# Altium PCB Simon PCB.PcbDoc
Units mil, origin at the board's own origin, x right, y up, seen from the top; angles counter-clockwise.
Board outline 6740 x 4045 mil, 2 copper layers (Top Layer, Bottom Layer); 33 components, 33 nets, 142 pads, 15 vias.
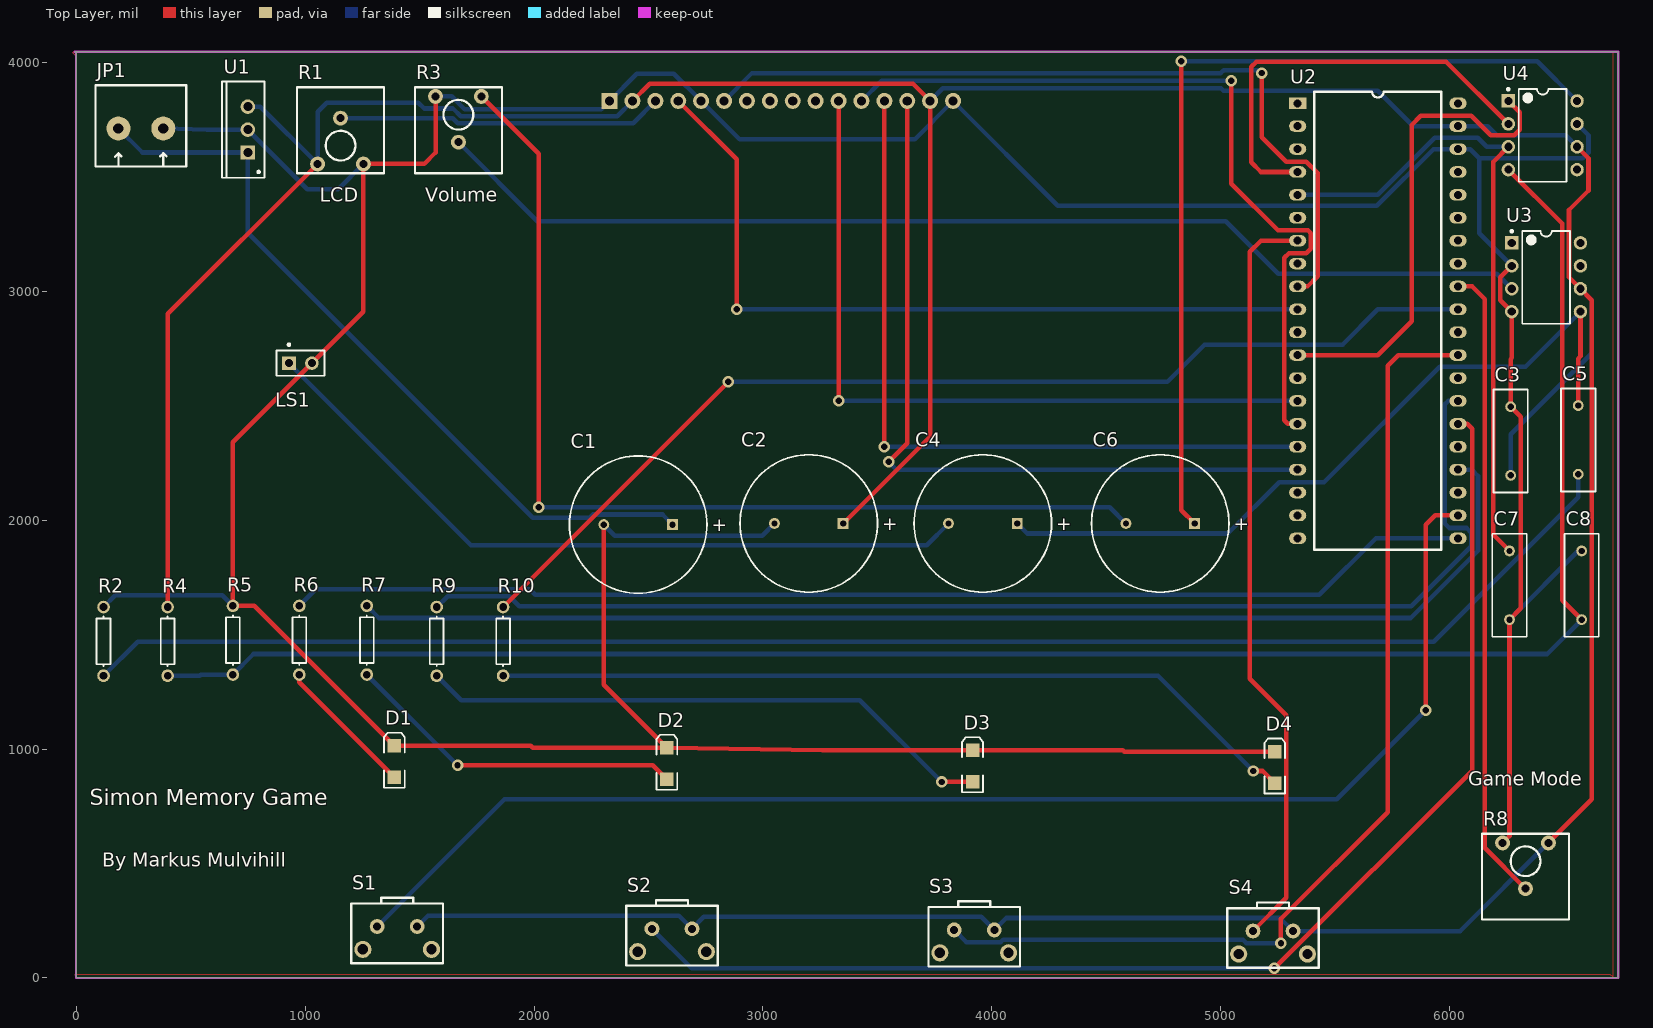
[diagram p0: Top Layer view]
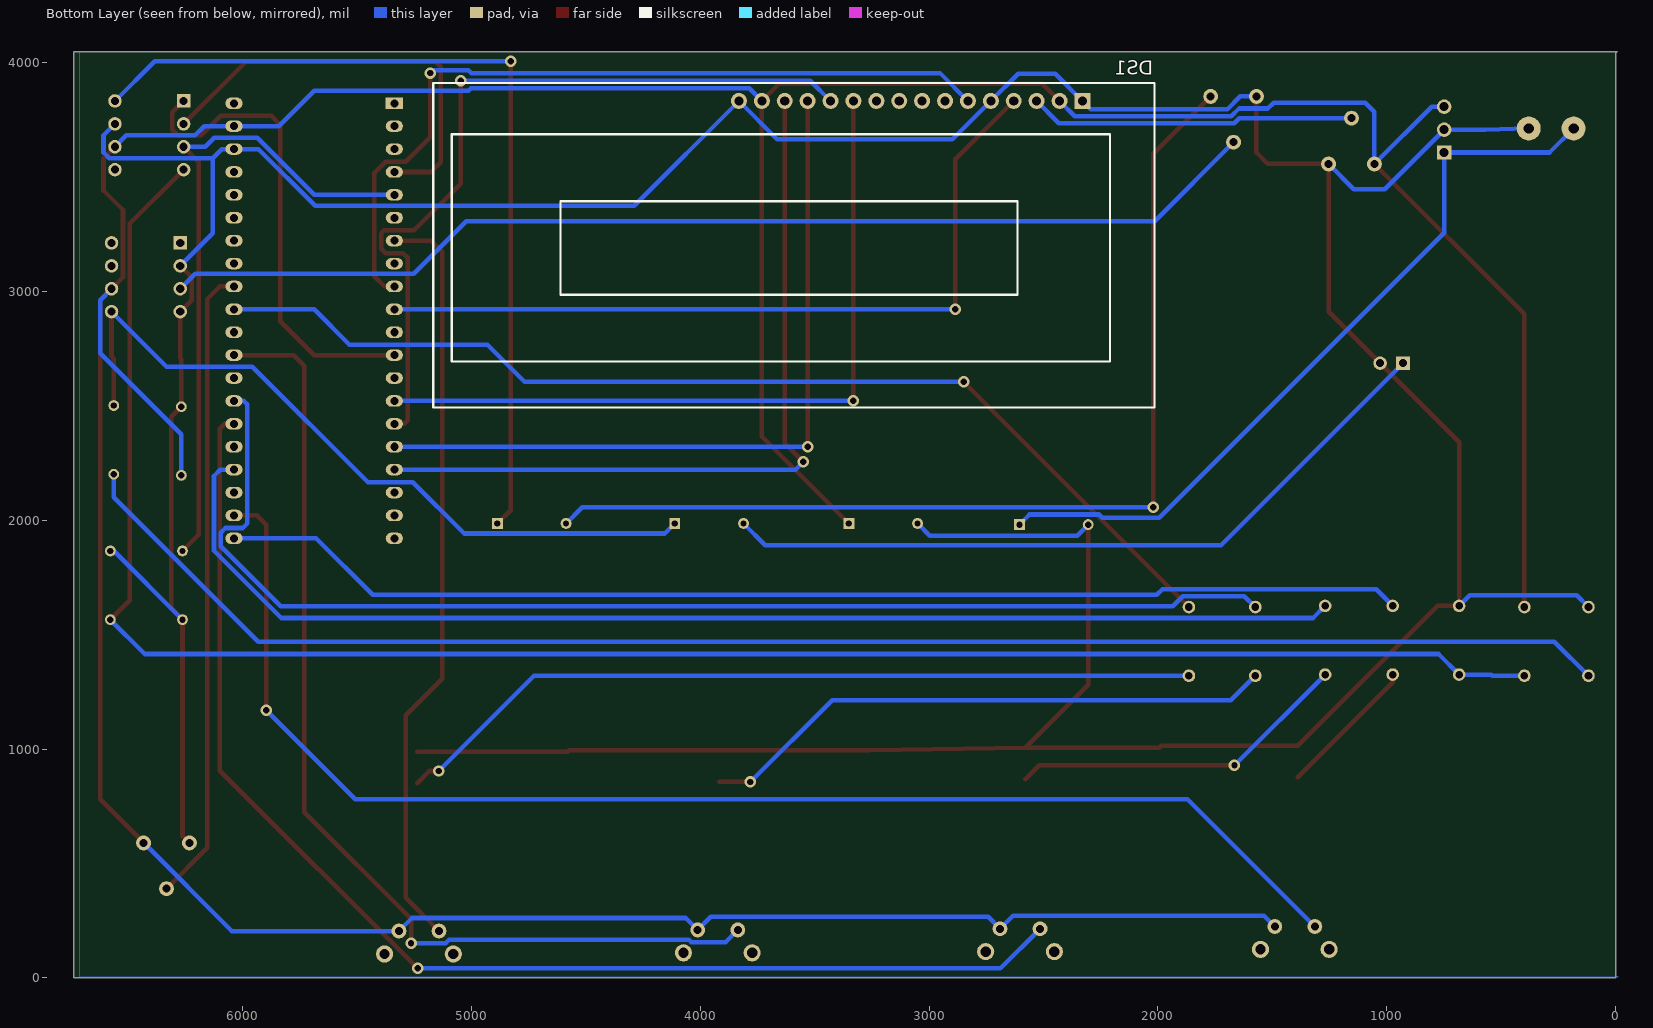
[diagram p1: Bottom Layer view, seen from below]

## Layer stack, top to bottom
Top Solder: solder mask 0.4, Solder Resist, Dk 3.5
Top Layer: signal copper 1.4
Dielectric 1: dielectric 12.6, FR-4, Dk 4.8
Bottom Layer: signal copper 1.4
Bottom Solder: solder mask 0.4, Solder Resist, Dk 3.5

## Board outline
0,0 0,4040 -5,4045 6735,4045 6735,0

## Design rules (kind name [scope] priority, off if disabled: settings)
Clearance [All] p1: gap=10 ignorepadtopadclearanceinfootprint=FALSE except(0: Arc-Hole Track-Hole SMDPad-Hole THPad-Hole Via-Hole Fill-Hole Poly-Hole Region-Hole Text-Hole)
PolygonConnect [All] p1: connectstyle=Relief reliefconductorwidth=10 reliefentries=4 polygonreliefangle="90 Angle" airgapwidth=10
RoutingVias [All] p1: holewidth=28 width=50 viastyle="Through Hole" minholewidth=28 minwidth=50 maxholewidth=28 maxwidth=50
SolderMaskExpansion [All] p1: expansion=4 istentingtop=FALSE
Width [All] p1: maxlimit=20 minlimit=10 preferedwidth=20
30 further rules are at their usual default settings.

## Components (designator, comment, footprint, x,y, rotation, side; value= is the part's Value field where it differs from the comment)
C1 "Cap Pol1" RB7.6-15 2455,1980 r0 top value=.47uF
C2 "Cap Pol1" RB7.6-15 3200,1985 r0 top value=47uF
C3 "Cap" RAD-0.3 6265,2345 r90 top value=10nF
C4 "Cap Pol1" RB7.6-15 3960,1985 r0 top value=270uF
C5 "Cap" RAD-0.3 6560,2350 r90 top value=100nF
C6 "Cap Pol1" RB7.6-15 4735,1985 r0 top value=100nF
C7 "Cap" RAD-0.3 6260,1715 r90 top value=1nF
C8 "Cap" RAD-0.3 6575,1715 r90 top value=10nF
D1 "LED2" 3.2X1.6X1.1 1390,945 r90 top
D2 "LED2" 3.2X1.6X1.1 2580,936.1 r90 top
D3 "LED2" 3.2X1.6X1.1 3915,925 r90 top
D4 "LED2" 3.2X1.6X1.1 5235,920 r90 top
DS1 "LCD 44780" "OLED 16x2" 2330,3830 r0 bottom
JP1 "Power Port" CON2screw 185,3710 r0 top
LS1 "Speaker" PIN2 930,2685 r0 top
R1 "RPot_3" "POT OFFSET 200" 1055,3555 r0 top value=10K
R2 "Res1" AXIAL-0.3 120,1470 r270 top value=10
R3 "RPot_3" "POT OFFSET 200" 1770,3850 r180 top value=10K
R4 "Res1" AXIAL-0.3 400,1470 r270 top value=6.8k
R5 "Res1" AXIAL-0.3 685,1475 r270 top value=1.2k
R6 "Res1" AXIAL-0.3 975,1475 r270 top value=1K
R7 "Res1" AXIAL-0.3 1270,1475 r270 top value=1K
R8 "RPot_3" "POT OFFSET 200" 6430,590 r180 top value=10K
R9 "Res1" AXIAL-0.3 1575,1470 r270 top value=1K
R10 "Res1" AXIAL-0.3 1865,1470 r270 top value=1K
S1 "SW-PB" "SW PB vertical" 1552.5,125 r180 top
S2 "SW-PB" "SW PB vertical" 2752.5,115 r180 top
S3 "SW-PB" "SW PB vertical" 4072.5,110 r180 top
S4 "SW-PB" "SW PB vertical" 5377.5,105 r180 top
U1 "LM2940CT-5.0" T03B 750,3705 r90 top
U2 "Raspberry Pi Pico" "Raspberry Pi Pico" 5335,3820 r0 top
U3 "LM386N-1" DIP-8 6420,3060 r0 top
U4 "LT1661" DIP-8 6405,3680 r0 top

## Footprints (in the part's own frame and the unit in brackets; to place one, negate y for a bottom-side part, rotate by r counter-clockwise, add the part's x,y. Pads: shape width x height; smd on the part's side, far side on the other; paste and mask are expansions set on the pad)
3.2X1.6X1.1 [mm] "SMT LED; 2 Flat Leads"
  rect 1.5x1.5 smd: 1(-1.75,0) 2(1.75,0)
  silkscreen extent -2.9,-1.15 3.2,1.15
AXIAL-0.3 [mm] "Axial Device, Thru-Hole; 2 Leads; 0.3 in Pin Spacing"
  round 1.4 hole 0.85: 1(-3.81,0) 2(3.81,0)
  silkscreen extent -2.77,-0.76 2.77,0.76
CON2screw [mil]
  round 105 hole 45: 1(0,0) 2(196,0)
  silkscreen extent -100,-166 296,189
DIP-8 [mm] "DIP; 8 Leads; Row Spacing 7.62 mm; Pitch 2.54 mm"
  rect 1.5x1.5 hole 0.9: 1(-3.81,3.81)
  round 1.5 hole 0.9: 2(-3.81,1.27) 3(-3.81,-1.27) 4(-3.81,-3.81) 5(3.81,-3.81) 6(3.81,-1.27) 7(3.81,1.27) 8(3.81,3.81)
  silkscreen extent -3.93,-5.15 2.65,5.23, body extent -3.6,-5.15 3.6,5.15, height 5.08
"OLED 16x2" [mil]
  rect 70x70 hole 40: 1(0,0)
  round 70 hole 40: 2(100,0) 3(200,0) 4(300,0) 5(400,0) 6(500,0) 7(600,0) 8(700,0) 9(800,0) 10(900,0) 11(1000,0) 12(1100,0) 13(1200,0) 14(1300,0) 15(1400,0) 16(1500,0)
  silkscreen extent -315,-79 2835,1339
PIN2 [mm] "Photosensitive Diode; 2 Leads"
  rect 1.5x1.5 hole 0.9: 1(0,0)
  round 1.5 hole 0.9: 2(2.54,0)
  silkscreen extent -1.4,-1.4 3.94,2.17
"POT OFFSET 200" [mil]
  round 65 hole 35: 1(0,0) 2(100,200) 3(200,0)
  silkscreen extent -90,-40 290,335
RAD-0.3 [mm] "Radial Cap, Thru-Hole; 2 Leads; 0.3 in Pin Spacing"
  round 1.2 hole 0.7: 1(-3.81,0) 2(3.81,0)
  silkscreen extent -5.71,-1.91 5.71,1.91
"Raspberry Pi Pico" [mil]
  rect 75x50 hole 35: 1(0,0)
  oval 75x50 hole 35: 2(0,-100) 3(0,-200) 4(0,-300) 5(0,-400) 6(0,-500) 7(0,-600) 8(0,-700) 9(0,-800) 10(0,-900) 11(0,-1000) 12(0,-1100) 13(0,-1200) 14(0,-1300) 15(0,-1400) 16(0,-1500) 17(0,-1600) 18(0,-1700) 19(0,-1800) 20(0,-1900) 21(700,-1900) 22(700,-1800) 23(700,-1700) 24(700,-1600) 25(700,-1500) 26(700,-1400) 27(700,-1300) 28(700,-1200) 29(700,-1100) 30(700,-1000) 31(700,-900) 32(700,-800) 33(700,-700) 34(700,-600) 35(700,-500) 36(700,-400) 37(700,-300) 38(700,-200) 39(700,-100) 40(700,0)
  silkscreen extent 72,-1950 628,50
RB7.6-15 [mm] "Polarized Capacitor (Radial); 2 Leads"
  rect 1.2x1.2 hole 0.7: 1(3.81,0)
  round 1.2 hole 0.7: 2(-3.81,0)
  silkscreen extent -7.62,-7.62 7.62,7.62
"SW PB vertical" [mil]
  round 65 hole 35: 1(62.5,-100) 2(237.5,-100)
  round 75 hole 45: 3(0,0) 4(300,0)
  silkscreen extent -50,-225 350,60
T03B [mm]
  rect 1.6x1.6 hole 1: 1(-2.54,0)
  round 1.6 hole 1: 2(0,0) 3(2.54,0)
  silkscreen extent -5.35,-1.85 5.35,2.85, body extent -5.4,-1.9 5.4,2.9, height 19.4

## Part data
C1 C2 C4 C6: "Polarized Capacitor (Radial)", LatestRevisionDate=17-Jul-2002, LatestRevisionNote="Re-released for DXP Platform.", PackageDescription="Polarized Capacitor (Radial); 2 Leads", PackageReference=RB7.6-15, Published=8-Jun-2000, Publisher="Altium Limited"
C3 C5 C7 C8: "Capacitor", LatestRevisionDate=17-Jul-2002, LatestRevisionNote="Re-released for DXP Platform.", PackageDescription="Radial Cap, Thru-Hole; 2 Leads; 0.3 in Pin Spacing", PackageReference=RAD-0.3, Published=8-Jun-2000, Publisher="Altium Limited"
D1 D2 D3 D4: "Typical RED, GREEN, YELLOW, AMBER GaAs LED", LatestRevisionDate=17-Jul-2002, LatestRevisionNote="Re-released for DXP Platform.", PackageDescription="SM LED; 2 Flat Leads", PackageReference=3.2X1.6X1.1, PackageVersion=Feb-2002, Published=8-Jun-2000, Publisher="Altium Limited"
JP1: library part Power
LS1: "Loudspeaker", LatestRevisionDate=17-Jul-2002, LatestRevisionNote="Re-released for DXP Platform.", PackageReference=PIN2, Published=24-Mar-1999, Publisher="Altium Limited"
R1 R3 R8: library part RPot, "Potentiometer", LatestRevisionDate=17-Jul-2002, LatestRevisionNote="Re-released for DXP Platform.", Published=8-Jun-2000, Publisher="Altium Limited", Set Position=0.5, Sim Note="Enter the Resistance value and the set point into parameter fields."
R2 R4 R5 R6 R7 R9 R10: "Resistor", LatestRevisionDate=17-Jul-2002, LatestRevisionNote="Re-released for DXP Platform.", PackageDescription="Axial Device, Thru-Hole; 2 Leads; 0.3 in Pin Spacing", PackageReference=AXIAL-0.3, Published=8-Jun-2000, Publisher="Altium Limited"
S1 S2 S3 S4: "DIGIKEY SW400-ND", LatestRevisionDate=17-Jul-2002, LatestRevisionNote="Re-released for DXP Platform.", Published=24-Mar-1999, Publisher="Altium Limited"
U1: library part LM2940CT-5.0_1, "1A Low Dropout Regulator, 3-pin TO-220", Manufacturer="National Semiconductor", PackageTopMarking="NSUZXYTTE#*LM2940CT*-5.0 P+", PowerWise=N, ComponentLink1Description="Manufacturer URL", ComponentLink1URL=http://www.national.com/, ComponentLink2Description="LM2940C Datasheet", ComponentLink2URL=http://www.national.com/ds/LM/LM2940C.pdf, ComponentLink3Description="LM2940C Web Page", ComponentLink3URL=http://www.national.com/pf/LM/LM2940C.html, ComponentLink4Description="T03B Package Page", ComponentLink4URL=http://www.national.com/packaging/folders/t03b.html, CompType="LDO IC", DatasheetVersion=Jan-2007, High-Reliability=Y, PackageDescription="TO-220, Molded, 3 Lead, Straight", PackageReference=T03B, PackageVersion="revL, Jan-1992", PartNumber=LM2940CT-5.0, PinCount=3, RoHS=N
U3: "Low-Voltage Audio Power Amplifier", PackageDocument=Sep-1997, DatasheetDocument=Sep-1997, PackageReference=N08E, Published=15-Apr-2002, Publisher="Altium Limited"

## Via types
v1: diameter 50, hole 28, Top Layer to Bottom Layer, 15 vias

## Nets (pads, with @x,y where several pads share a name; then routed paths per layer and width w, separated by ;. In a path a pad name is that pad's centre, name@x,y a point inside that pad or via, vN(x,y) a via of type N, cw(c..) or ccw(c..) an arc to the next point about the centre after c; other vN are vias at no path point)
+5V: C2.1 C3.1 DS1.2 DS1.15 R1.1 R4.1 R8.1 S1.1 S2.1 S3.1 S4.1 U1.3 U2.39 U3.6 U4.6 | length 20036.6
  Top Layer w20: R4.1 400,2900 R1.1 ; DS1.2 2505,3905 3655,3905 DS1.15 3730,2365 C2.1 ; R8.1 6620,780 6620,2960 U3.6 6520,3060 6520,3354 6605,3439 6605,3580 U4.6
  Bottom Layer w20: U1.3 805,3805 R1.1 1055,3783 1095,3823 1495,3823 1521,3797 1646,3797 1680,3763 2363,3763 DS1.2 ; S1.1 1537,272 2633,272 S2.1 2742,267 3953,267 S3.1 4062,262 5258,262 S4.1 6045,205 R8.1 ; DS1.15 3785,3885 5000,3885 5011,3874 5685,3874 5839,3720 U2.39 6165.47,3720 6205.47,3680 6505,3680 U4.6 ; C3.1 6265,2374 6620,2729 6620,2960 U3.6
+9V: C1.1 JP1.1 U1.1 | length 3353.2
  Bottom Layer w20: JP1.1 290,3605 U1.1 750,3255 1995,2010 2243,2010 2257,2024 2561,2024 C1.1
B_LED: R7.1 U2.24 | length 5422.2
  Bottom Layer w20: R7.1 1323,1572 5829.5,1572 6122.5,1865 6122.5,2192.5 6095,2220 U2.24
B_PUSH: S2.2 U2.26 | length 5574.8
  Top Layer w20: v1(5233.18,42) 6097,905.82 6097,2398 6075,2420 U2.26
  Bottom Layer w20: S2.2 2688,42 v1(5233.18,42)
BRIGHT: DS1.3 R1.2 | length 1424.3
  Bottom Layer w20: R1.2 1645,3755 1667,3733 2433,3733 DS1.3
CS: U2.12 U4.1 | length 2096.1
  Top Layer w20: U2.12 5685,2720 5833,2868 5833,3725 5873,3765 6093,3765 6178,3680 6280,3680 6305,3705 6305,3780 U4.1
D4: DS1.11 U2.14 | length 3315
  Top Layer w20: v1(3330,2520) DS1.11
  Bottom Layer w20: v1(3330,2520) U2.14
D5: DS1.12 U2.15 | length 3512.8
  Top Layer w20: v1(5045,3919) 5045,3469 5249,3265 5380,3265 5392.5,3252.5 5392.5,3185 5372.5,3165 5297,3165 5277,3145 5277,2435 5292,2420 U2.15
  Bottom Layer w20: DS1.12 3519,3919 v1(5045,3919)
D6: DS1.13 U2.16 | length 3315
  Top Layer w20: v1(3530,2320) DS1.13
  Bottom Layer w20: v1(3530,2320) U2.16
D7: DS1.14 U2.17 | length 3409.6
  Top Layer w20: v1(3549,2254) 3630,2335 DS1.14
  Bottom Layer w20: v1(3549,2254) 3583,2220 U2.17
EN: DS1.6 U2.9 | length 3555.1
  Top Layer w20: v1(5178,3952) 5178,3672 5285,3565 5373,3565 5422.5,3515.5 5422.5,3064.5 5378,3020 U2.9
  Bottom Layer w20: DS1.6 2952,3952 4999.56,3952 5012.03,3964.47 5165.53,3964.47 v1(5178,3952)
G_LED: R10.1 U2.31 | length 4708.5
  Top Layer w20: R10.1 v1(2848,2603)
  Bottom Layer w20: v1(2848,2603) 4765,2603 4928,2766 5531,2766 5685,2920 U2.31
G_PUSH: S4.2 U2.7 | length 3321.2
  Top Layer w20: S4.2 5285,350 5285,1147 5126,1306 5126,3171 5175,3220 U2.7
GND: C1.2 C2.2 C3.2 C7.1 C8.2 D1.2 D2.2 D3.2 D4.2 DS1.1 DS1.5 DS1.16 JP1.2 LS1.2 R1.3 R2.1 R3.3 R5.1 R8.3 U1.2 U2.38 U3.2 U3.4 U4.7 | length 20424.2
  Top Layer w20: R3.3 1570,3605 1520,3555 R1.3 1255,2910 LS1.2 685,2340 R5.1 778.9,1625 D1.2 1985,1013.9 1993.9,1005 D2.2 ; C1.2 2305,1280 D2.2 ; D4.2 4577,988.9 4572,993.9 D3.2 3258.1,993.9 D2.2 ; R8.3 6260,620 C7.1 6309,1614 6309,2451 C3.2 6265,2703 6270,2708 U3.4 6220,2960 6220,3060 U3.2
  Bottom Layer w20: R2.1 172,1672 638,1672 R5.1 ; JP1.2 571,3705 U1.2 1010,3445 1145,3445 R1.3 ; R3.3 1641,3850 1698,3793 2293,3793 DS1.1 2449,3949 2611,3949 DS1.5 2898,3662 3662,3662 DS1.16 4288,3372 5680,3372 5928,3620 U2.38 6088,3620 6128,3580 ; C1.2 2353,1932 2997,1932 C2.2 ; C7.1 6560,1865 C8.2 ; U3.2 6128,3252 6128,3580 ; U4.7 6605,3680 6605,3605 6580,3580 6128,3580
MOSI: C7.2 U2.5 U4.3 | length 2860.2
  Top Layer w20: U4.3 6190,3565 6190,1935 C7.2
  Bottom Layer w20: U2.5 5685,3420 5934,3669 6122,3669 6161,3630 U4.3
NetC4_1: C4.1 C5.2 U3.5 | length 3293.7
  Top Layer w20: C5.2 6560,2705 6570,2715 U3.5
  Bottom Layer w20: C4.1 4154,1941 5030,1941 5254,2165 5450,2165 5955,2670 6330,2670 U3.5
NetC5_1: C5.1 R2.2 | length 6863.7
  Bottom Layer w20: R2.2 269,1469 5930,1469 6560,2099 C5.1
NetC6_1: C6.1 U4.8 | length 3843.1
  Top Layer w20: v1(4827,4004) 4827,2043 C6.1
  Bottom Layer w20: v1(4827,4004) 6381,4004 U4.8
NetC8_1: C8.1 R4.2 R5.2 U4.4 | length 8374
  Top Layer w20: U4.4 6490,3295 6490,1650 C8.1
  Bottom Layer w20: R4.2 540,1320 545,1325 R5.2 775,1415 6425,1415 C8.1
NetD1_1: D1.1 R6.2 | length 620.8
  Top Layer w20: R6.2 975,1291.1 D1.1
NetD2_1: D2.1 R7.2 | length 1499.6
  Top Layer w20: v1(1666,929) 2518.2,929 D2.1
  Bottom Layer w20: R7.2 v1(1666,929)
NetD3_1: D3.1 R9.2 | length 2532.2
  Top Layer w20: v1(3780,856.1) D3.1
  Bottom Layer w20: R9.2 1682,1213 3423.1,1213 v1(3780,856.1)
NetD4_1: D4.1 R10.2 | length 3564.2
  Top Layer w20: v1(5141,904) 5182.1,904 D4.1
  Bottom Layer w20: R10.2 4725,1320 v1(5141,904)
OUTDAC: C6.2 R3.1 | length 4492.5
  Top Layer w20: R3.1 2020,3600 v1(2020,2055)
  Bottom Layer w20: v1(2020,2055) 4515,2055 C6.2
R_LED: R9.1 U2.27 | length 5439.6
  Bottom Layer w20: R9.1 1622.56,1667.56 1891.44,1667.56 1935,1624 5831.5,1624 6092.5,1885 6092.5,1945 6072.5,1965 5997,1965 5977,1985 5977,2505 5992,2520 U2.27
R_PUSH: S3.2 U2.29 | length 4499.5
  Top Layer w20: v1(5262,152.5) 5262,258 5728,724 5728,2673 5775,2720 U2.29
  Bottom Layer w20: S3.2 3888,157 4038.18,157 4048.68,167.5 5096.32,167.5 5111.32,152.5 v1(5262,152.5)
RS: DS1.4 U2.10 | length 3465.6
  Top Layer w20: DS1.4 2885,3575 v1(2885,2920)
  Bottom Layer w20: v1(2885,2920) U2.10
SCK: U2.4 U4.2 | length 1881.2
  Top Layer w20: U2.4 5175,3520 5133,3562 5133,3980 5155,4002 5983,4002 U4.2
SELECT: R8.2 U2.32 | length 2788.5
  Top Layer w20: U2.32 6097,3020 6152,2965 6152,568 R8.2
SPEAKER: C4.2 LS1.1 | length 3248.7
  Bottom Layer w20: LS1.1 1725,1890 3715,1890 C4.2
VOLUME: R3.2 U3.3 | length 4865.1
  Bottom Layer w20: R3.2 2015,3305 5021,3305 5251,3075 6205,3075 U3.3
Y_LED: R6.1 U2.21 | length 5202.5
  Bottom Layer w20: R6.1 1047.56,1697.56 1980.44,1697.56 2005,1673 5430,1673 5677,1920 U2.21
Y_PUSH: S1.2 U2.22 | length 5938
  Top Layer w20: v1(5895,1170) 5895,1980 5935,2020 U2.22
  Bottom Layer w20: S1.2 1871,781 5506,781 v1(5895,1170)
pads on no net: DS1.7 DS1.8 DS1.9 DS1.10 S1.3 S1.4 S2.3 S2.4 S3.3 S3.4 S4.3 S4.4 U2.1 U2.2 U2.3 U2.6 U2.8 U2.11 U2.13 U2.18 U2.19 U2.20 U2.23 U2.25 U2.28 U2.30 U2.33 U2.34 U2.35 U2.36 U2.37 U2.40 U3.1 U3.7 U3.8 U4.5

## Polygon pours and split planes (outlines as drawn)
+5V on Top Layer "NONET_L01_P001" (hatched 45Degree grid 20 track 8, shelved, pour order 1): 0,15 0,4025 -15,4040 -10,4045 6710,4045 6710,5 6700,15 -5,15
GND on Bottom Layer "NONET_L02_P000" (hatched 45Degree grid 20 track 8, shelved, pour order 0): 0,5 0,4045 6710,4045 6710,5 -10,5

## Keep-outs
Top Layer:
  lines w10: -5,4045 6735,4045 6735,0 0,0 0,4040

## Silkscreen, mask and mechanical layers (free items; w line width, h text height)
Top Overlay:
  text "LCD" at 1065,3390 h60
  text "Volume" at 1525,3390 h60
  text "Game Mode" at 6080,840 h60
  text "Simon Memory Game" at 60,755 h70
  text "By Markus Mulvihill" at 115,485 h60

## Text inside footprints (layer, text, board x,y; h text height)
C1: Top Overlay "+" at 2775.15,1950.99 h59.06
C2: Top Overlay "+" at 3520.15,1955.99 h59.06
C4: Top Overlay "+" at 4280.15,1955.99 h59.06
C6: Top Overlay "+" at 5055.15,1955.99 h59.06